# EAGLE board transmisorPCB_2.2 (EAGLE 7.6.0)
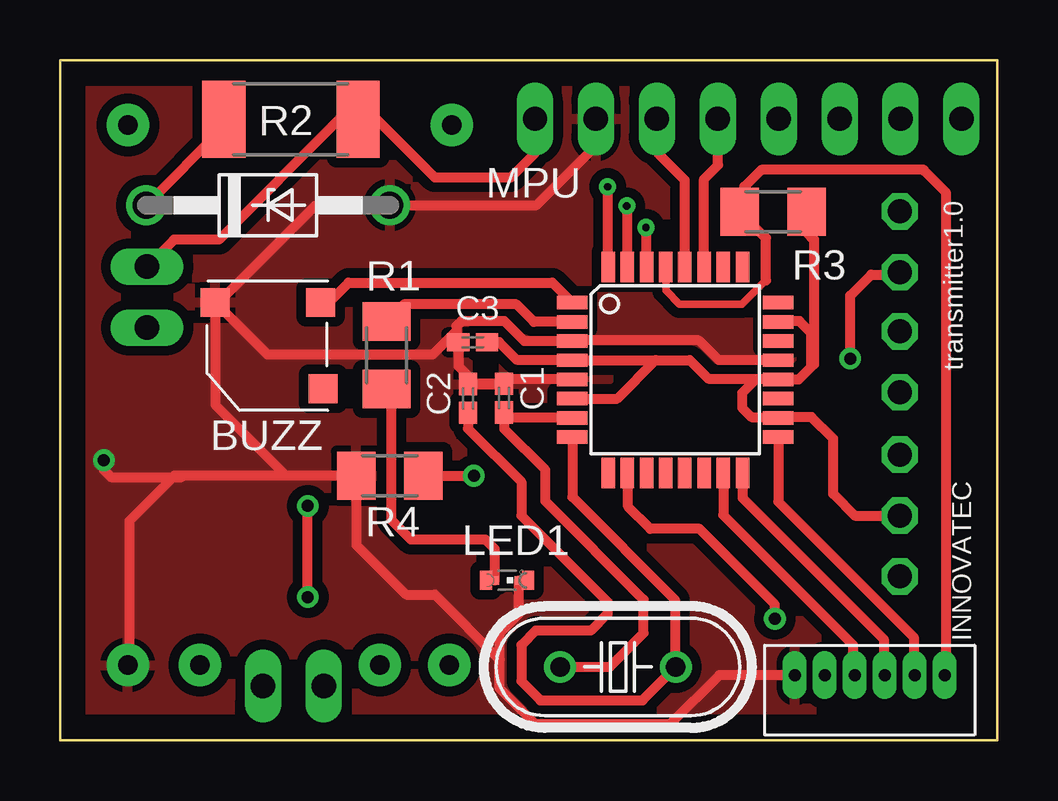
[diagram p0: board, top side]
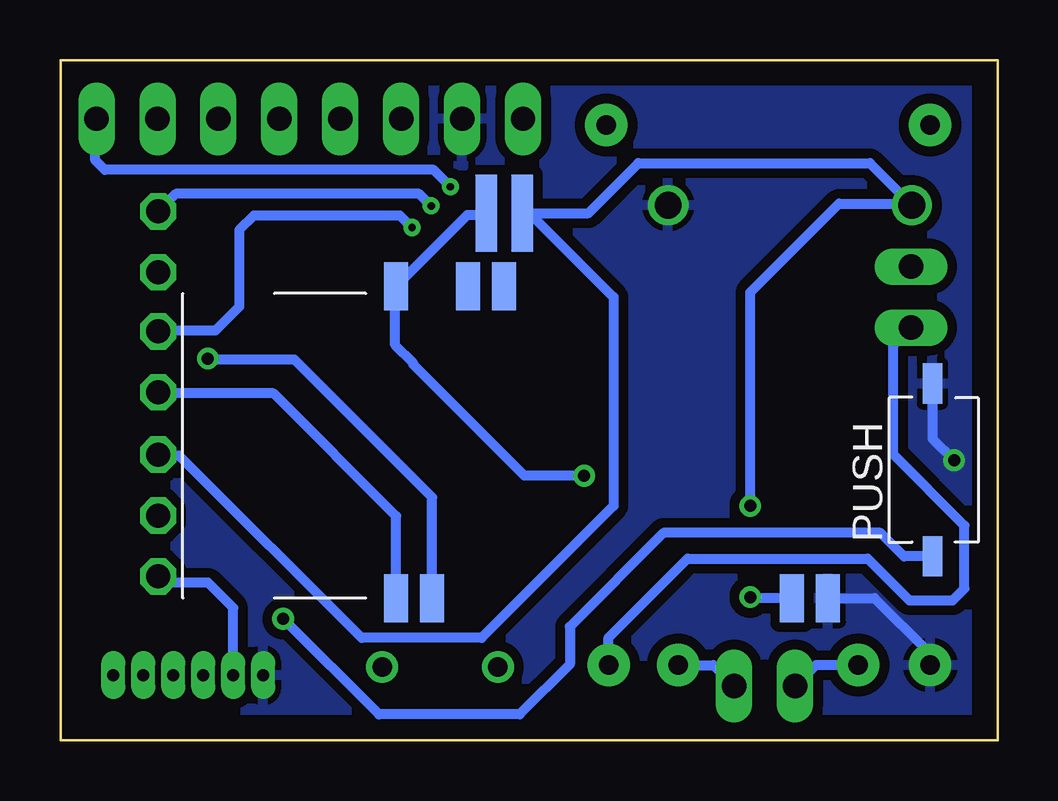
[diagram p1: board, bottom side, seen from below]

Size 39.07 x 28.35 mm. Coordinates in mm from the lower left corner, seen from the top.
Outline: 0.01,28.35 39.07,28.35 39.07,0 0,0 0,28.33
Copper layers (1*16): Top 0.035mm / dielectric 1.5mm / Bottom 0.035mm
Design rules "default": minimum track width 10mil, minimum drill 24mil, track to track 8mil, track to pad 8mil, pad to pad 8mil, via to via 8mil, smd to smd 8mil, copper to edge 40mil, drill to drill 8mil, minimum pad ring 10mil, minimum via ring 8mil, stop-mask expansion 4mil, vias tented up to drill 0mil, thermal gap 10mil

## Footprints (pad centres in the part's own frame; a part is rotated, then mirrored left to right if it is on the bottom)
PINHEAD_125_1X6 = drill 0.5 long: 1 -2.5,1.25; 2 -1.25,1.25; 3 0,1.25; 4 1.25,1.25; 5 2.5,1.25; 6 3.75,1.25
TSW-103-02-S-S-RA = drill 1 pad 1.5 octagon: 1 2.54,1.524; 2 0,1.524; 3 -2.54,1.524
BLUETOOTH_SMD = smd 2 x 1: 1 -6.35,3.81; 2 -6.35,2.31; 12 -6.35,-12.69; 13 -6.35,-14.19; 31 6.65,-0.69; 32 6.65,0.81; 34 6.65,3.81
SM05ET02A = smd 1.2 x 1.2: 1 -2.34,1.84; 2 -2.24,-1.76; 3 2.16,-1.76
C0402K = smd 0.925 x 0.74: 1 -0.6,0; 2 0.6,0
DO41Z10 = drill 1.118: A 5.08,0; C -5.08,0
TQFP32-08 = smd 1.27 x 0.559: 1 -4.293,2.8; 2 -4.293,2; 3 -4.293,1.2; 4 -4.293,0.4; 5 -4.293,-0.4; 6 -4.293,-1.2; 7 -4.293,-2; 8 -4.293,-2.8; 17 4.293,-2.8; 18 4.293,-2; 19 4.293,-1.2; 20 4.293,-0.4; 21 4.293,0.4; 22 4.293,1.2; 23 4.293,2; 24 4.293,2.8 | smd 0.559 x 1.27: 9 -2.8,-4.293; 10 -2,-4.293; 11 -1.2,-4.293; 12 -0.4,-4.293; 13 0.4,-4.293; 14 1.2,-4.293; 15 2,-4.293; 16 2.8,-4.293; 25 2.8,4.293; 26 2,4.293; 27 1.2,4.293; 28 0.4,4.293; 29 -0.4,4.293; 30 -1.2,4.293; 31 -2,4.293; 32 -2.8,4.293
1X02 = drill 1.016 long: 1 -1.27,0; 2 1.27,0
CHIPLED-0603-TTW = smd 0.8 x 0.5: A 0,-0.875; C 0,0.875 | smd 0.35 x 0.35: A@1 0,-0.5; C@1 0,0.5
1X08 = drill 1.016 long: 1 -8.89,0; 2 -6.35,0; 3 -3.81,0; 4 -1.27,0; 5 1.27,0; 6 3.81,0; 7 6.35,0; 8 8.89,0
PUSH_SMD = smd 1.676 x 0.813: 1 -3.4,-0.1; 2 3.8,-0.1
HC49U70 = drill 0.813: 1 -2.413,0; 2 2.413,0
M1206 = smd 1.6 x 2: 1 -1.4,0; 2 1.4,0
R2512 = smd 1.8 x 3.2: 1 -2.8,0; 2 2.8,0
TSW-102-02-S-S-RA = drill 1 pad 1.5 octagon: 1 1.27,1.524; 2 -1.27,1.524
CP150_1X2 = smd 0.9 x 3.2: 1 -0.7,4.4; 2 0.8,4.4
TP4056 = drill 0.8 pad 1.778: B+ -10.16,-4.15; B- -10.16,3.35; I+ 12.34,-7.15; I- 12.34,6.35; O+ -10.16,-7.05; O- -10.16,6.35

## Placement (x,y rotation side)
6X1  PINHEAD_1X6  [PINHEAD_125_1X6]  33.13,1.47 0 top
ALIM  TSW-103-02-S-S-RA  [TSW-103-02-S-S-RA]  36.53,9.37 90 top
BLUETOOTH  HC-05_BASIC  [BLUETOOTH_SMD]  21.28,12.28 90 bottom
BUZZ  SM05ET02A  [SM05ET02A]  8.63,16.49 180 top
C1  [C0402K]  18.51,14.26 90 top
C2  [C0402K]  17.01,14.25 90 top
C3  [C0402K]  17.2,16.59 0 top
D1  1N4728  [DO41Z10]  8.67,22.3 0 top
IC1  MEGA8-AI  [TQFP32-08]  25.65,15.44 0 top
JP1  [1X02]  3.63,18.47 90 top
JP2  [1X02]  9.73,2.27 180 top
LED1  [CHIPLED-0603-TTW]  18.63,6.67 270 top
MPU  [1X08]  28.69,25.9 180 top
PUSH  PUSH_SMD  [PUSH_SMD]  2.83,11.07 90 bottom
Q3  [HC49U70]  23.26,3.06 180 top
R1  [M1206]  13.62,16.05 270 top
R2  [R2512]  9.63,25.88 180 top
R3  [M1206]  29.73,22.03 180 top
R4  [M1206]  13.75,11.03 180 top
RX  TSW-102-02-S-S-RA  [TSW-102-02-S-S-RA]  36.53,15.77 90 top
TX  TSW-102-02-S-S-RA  [TSW-102-02-S-S-RA]  36.53,20.77 90 top
U$1  CP150_1X2  [CP150_1X2]  20.63,17.57 0 bottom
U$2  TP4056  [TP4056]  9.18,13.3 90 top

## Library data of the parts
6X1 = pinhead_125
ALIM RX TX = con-samtec; OC_FARNELL: unknown; OC_NEWARK: unknown
BLUETOOTH = hc05-own
BUZZ = buzzer2
C1-C3 R1 R3 R4 = rcl
D1 = diode
IC1 = atmel; MPN: ATMEGA8-16AU; OC_FARNELL: 9171371; OC_NEWARK: 73M8863
JP1 JP2 MPU = pinhead
LED1 = led
PUSH = push
Q3 = crystal; OC_FARNELL: unknown; OC_NEWARK: unknown
R2 = resistor
U$1 = cp150
U$2 = tp4056

## Nets
3.3V: ALIM.1 BLUETOOTH.12 D1.C R2.2 U$1.2
5V: 6X1.2 ALIM.3
GND: 6X1.1 BLUETOOTH.13 BUZZ.3 C1.2 C2.2 C3.1 D1.A IC1.3 IC1.5 IC1.21 LED1.C@1 MPU.7 PUSH.2 R4.2 U$2.O-
INT: IC1.32 MPU.1
MISO: 6X1.4 IC1.16
MOSI: 6X1.3 IC1.15
N$1: JP1.1 U$2.O+
N$2: BLUETOOTH.2 TX.2
N$3: C1.1 IC1.7 Q3.2
N$4: C2.1 IC1.8 Q3.1
N$5: BUZZ.2 IC1.1
N$6: IC1.2 R1.1
N$7: JP2.2 U$2.B-
N$8: BLUETOOTH.1 RX.2
N$9: JP2.1 U$2.B+
N$10: LED1.A@1 R1.2
N$12: BLUETOOTH.34 R4.1 U$1.1
N$13: IC1.10 PUSH.1
RST: 6X1.6 IC1.29 R3.2
RX-BT: IC1.30 RX.1
SCK: 6X1.5 IC1.17
SCL: IC1.28 MPU.6
SDA: IC1.27 MPU.5
TX-BT: IC1.31 TX.1
VCC: ALIM.2 C3.2 IC1.4 IC1.6 IC1.18 IC1.20 IC1.23 R3.1
VIN: JP1.2 MPU.8 R2.1

## Tracks (layer width: path | path; a pad name or v marks a point on that pad's centre or on a via)
3.3V  (via drill 0.5)
  Top 0.406: R2.2 6.83,25.54 D1.C | v10.33,5.97 v10.33,9.77
  Bottom 0.406: BLUETOOTH.12 10.29,5.93 v10.33,5.97 | v10.33,9.77 10.33,18.67 6.63,22.37 3.66,22.37 D1.C 5.34,24.05 14.99,24.05 17.07,21.97 U$1.2 19.53,21.97 16.03,18.47 16.03,9.77 21.53,4.27 26.53,4.27 34.13,11.87 34.97,11.87 ALIM.1
5V
  Bottom 0.406: 6X1.2 31.88,5.52 32.93,6.57 34.75,6.57 ALIM.3
GND  (via drill 0.5)
  Top 0.406: C2.2 C1.2 18.69,15.04 IC1.5 18.6,15.04 18.33,14.77 18.33,14.87 17.33,14.87 16.63,15.57 16.63,16.56 C3.1 16.53,16.66 16.53,17.07 | MPU.7 22.43,25.81 22.43,24.87 19.86,22.3 D1.A 13.72,22.27 10.63,22.27 6.61,18.25 BUZZ.3 | IC1.21 27.46,15.84 26.63,16.67 21.39,16.67 IC1.3 19.36,16.64 18.53,17.47 16.73,17.47 16.53,17.27 16.53,17.07 | 16.53,17.07 15.53,16.07 8.65,16.07 BUZZ.3 | R4.2 9.43,11.03 | 9.43,11.03 5.13,11.03 | 5.13,11.03 4.78,11.03 2.89,9.14 2.89,3.2 U$2.O- | R4.2 10.37,11.03 | 6X1.1 27.48,2.72 25.43,0.67 19.83,0.67 18.33,2.17 18.33,3.37 | 18.33,3.37 18.33,4.47 19.13,5.27 LED1.C@1 | R4.2 12.35,8.15 14.43,6.07 15.63,6.07 18.33,3.37 | v1.83,11.67 1.83,11.27 2.13,10.97 5.07,10.97 5.13,11.03 | BUZZ.3 6.47,13.99 9.43,11.03
  Bottom 0.406: PUSH.2 2.73,12.57 v1.83,11.67 | BLUETOOTH.13 5.15,5.93 2.89,3.67 2.89,3.2 U$2.O-
  pour Bottom (isolate 0.406): -2.11,28.08 39.59,28.38 39.75,-0.38 -2.05,-0.48
  pour Top (isolate 0.406): -1.11,28.71 39.62,28.17 39.63,-0.56 -1,-0.02
INT  (via drill 0.3)
  Top 0.406: IC1.32 22.85,23.05 v22.83,23.07
  Bottom 0.406: v22.83,23.07 23.53,23.77 37.23,23.77 37.63,24.17 37.63,25.85 MPU.1
MISO
  Top 0.406: IC1.16 28.45,10.11 34.34,4.22 34.34,2.76 6X1.4
MOSI
  Top 0.406: IC1.15 27.65,9.39 33.06,3.98 33.06,2.79 6X1.3
N$1
  Bottom 0.406: U$2.O+ 16.23,4.28 12.94,7.57 5.43,7.57 3.69,5.83 1.89,5.83 1.4,6.32 1.4,8.95 4.37,11.92 4.37,16.46 JP1.1
N$2  (via drill 0.5)
  Top 0.406: v32.94,15.91 32.94,18.53 33.82,19.41 34.92,19.41 TX.2
  Bottom 0.406: v32.94,15.91 32.9,15.87 29.33,15.87 23.59,10.13 BLUETOOTH.2
N$3
  Top 0.406: IC1.7 18.73,13.44 C1.1 18.53,13.64 18.53,12.97 20.23,11.27 20.23,9.97 24.33,5.87 24.33,4.47 22.92,3.06 Q3.2
N$4
  Top 0.406: IC1.8 21.36,10.14 25.63,5.87 25.63,3.1 Q3.1 24.28,1.67 20.03,1.67 19.23,2.47 19.23,3.97 19.83,4.57 22.13,4.57 22.83,5.27 22.83,5.77 19.23,9.37 19.23,10.77 17.01,12.99 C2.1
N$5
  Top 0.406: IC1.1 20.53,19.07 12.03,19.07 11.21,18.25 BUZZ.2
N$6
  Top 0.406: IC1.2 19.76,17.44 19.03,18.17 14.34,18.17 R1.1
N$7
  Bottom 0.406: U$2.B- 7.59,3.14 JP2.2
N$8
  Bottom 0.406: RX.2 34.97,14.46 30.2,14.46 25.09,9.35 BLUETOOTH.1
N$9
  Bottom 0.406: U$2.B+ 11.87,3.14 JP2.1
N$10
  Top 0.406: LED1.A@1 18.13,7.97 17.73,8.37 14.63,8.37 13.83,9.17 13.83,14.44 R1.2
N$12  (via drill 0.5)
  Top 0.406: R4.1 v17.25,11.03
  Bottom 0.406: U$1.1 21.33,21.89 22.13,21.89 BLUETOOTH.34 25.13,18.89 25.13,16.47 24.37,15.71 24.37,15.66 19.74,11.03 v17.25,11.03
N$13  (via drill 0.5)
  Top 0.406: v29.8,5.07 29.8,5.67 26.66,8.81 24.61,8.81 23.68,9.74 23.68,11.12 IC1.10
  Bottom 0.406: PUSH.1 3.92,7.67 4.9,8.65 13.94,8.65 17.85,4.74 17.85,3.17 19.94,1.08 25.81,1.08 v29.8,5.07
RST
  Top 0.305: IC1.29 25.25,18.75 25.83,18.17 28.43,18.17 29.43,19.17
  Top 0.406: 29.43,19.17 29.43,20.93 R3.2 28.53,22.23 28.53,23.07 29.23,23.77 36.03,23.77 36.03,23.73 36.92,22.84 36.92,2.76 6X1.6
RX-BT  (via drill 0.3)
  Top 0.406: IC1.30 24.45,21.35 v24.43,21.37
  Bottom 0.406: v24.43,21.37 24.93,21.87 31.03,21.87 31.63,21.27 31.63,18.07 32.63,17.07 34.98,17.07 RX.1
SCK
  Top 0.406: IC1.17 29.94,9.95 35.59,4.3 35.59,2.76 6X1.5
SCL
  Top 0.406: IC1.28 26.05,23.35 24.93,24.47 24.93,25.75 MPU.6
SDA
  Top 0.406: IC1.27 26.85,23.39 27.43,23.97 27.43,25.79 MPU.5
TX-BT  (via drill 0.3)
  Top 0.406: IC1.31 23.65,22.25 v23.63,22.27
  Bottom 0.406: v23.63,22.27 24.13,22.77 34.28,22.77 TX.1
VCC
  Top 0.406: 24.83,15.84 IC1.4 21.33,15.87 19.03,15.87 18.31,16.59 C3.2 | 24.83,15.84 26.26,15.84 27.03,15.07 29.91,15.07 IC1.20 | IC1.6 23.23,14.24 24.83,15.84 | IC1.20 29,15.04 28.43,14.47 28.43,13.87 28.83,13.47 29.91,13.47 IC1.18 29.97,13.47 31.33,13.47 32.23,12.57 32.23,10.27 33.13,9.37 ALIM.2 | IC1.20 30.8,15.04 31.33,15.57 | 31.33,15.57 31.33,16.97 30.83,17.47 29.97,17.47 IC1.23 | 31.33,15.57 31.43,15.67 31.43,20.87 31.13,21.17 R3.1
VIN
  Top 0.406: JP1.2 4.76,20.87 6.63,20.87 11.64,25.88 R2.1 13.2,25.88 15.62,23.46 18.8,23.46 19.77,24.43 19.77,25.87 MPU.8

## Text on the board
tNames: transmitter1.0 | INNOVATEC